# Altium PCB Odrive.PcbDoc (part 4 of 4)
Units mil, origin at the board's own origin, x right, y up, seen from the top; angles counter-clockwise.
Board outline 2874.02 x 1968.5 mil, 4 copper layers (Top Layer, Power, Signal, Bottom Layer), stack 74.892 mil thick; 198 components, 162 nets, 717 pads, 948 vias.
Unrouted connection lines stored in the file: 81.
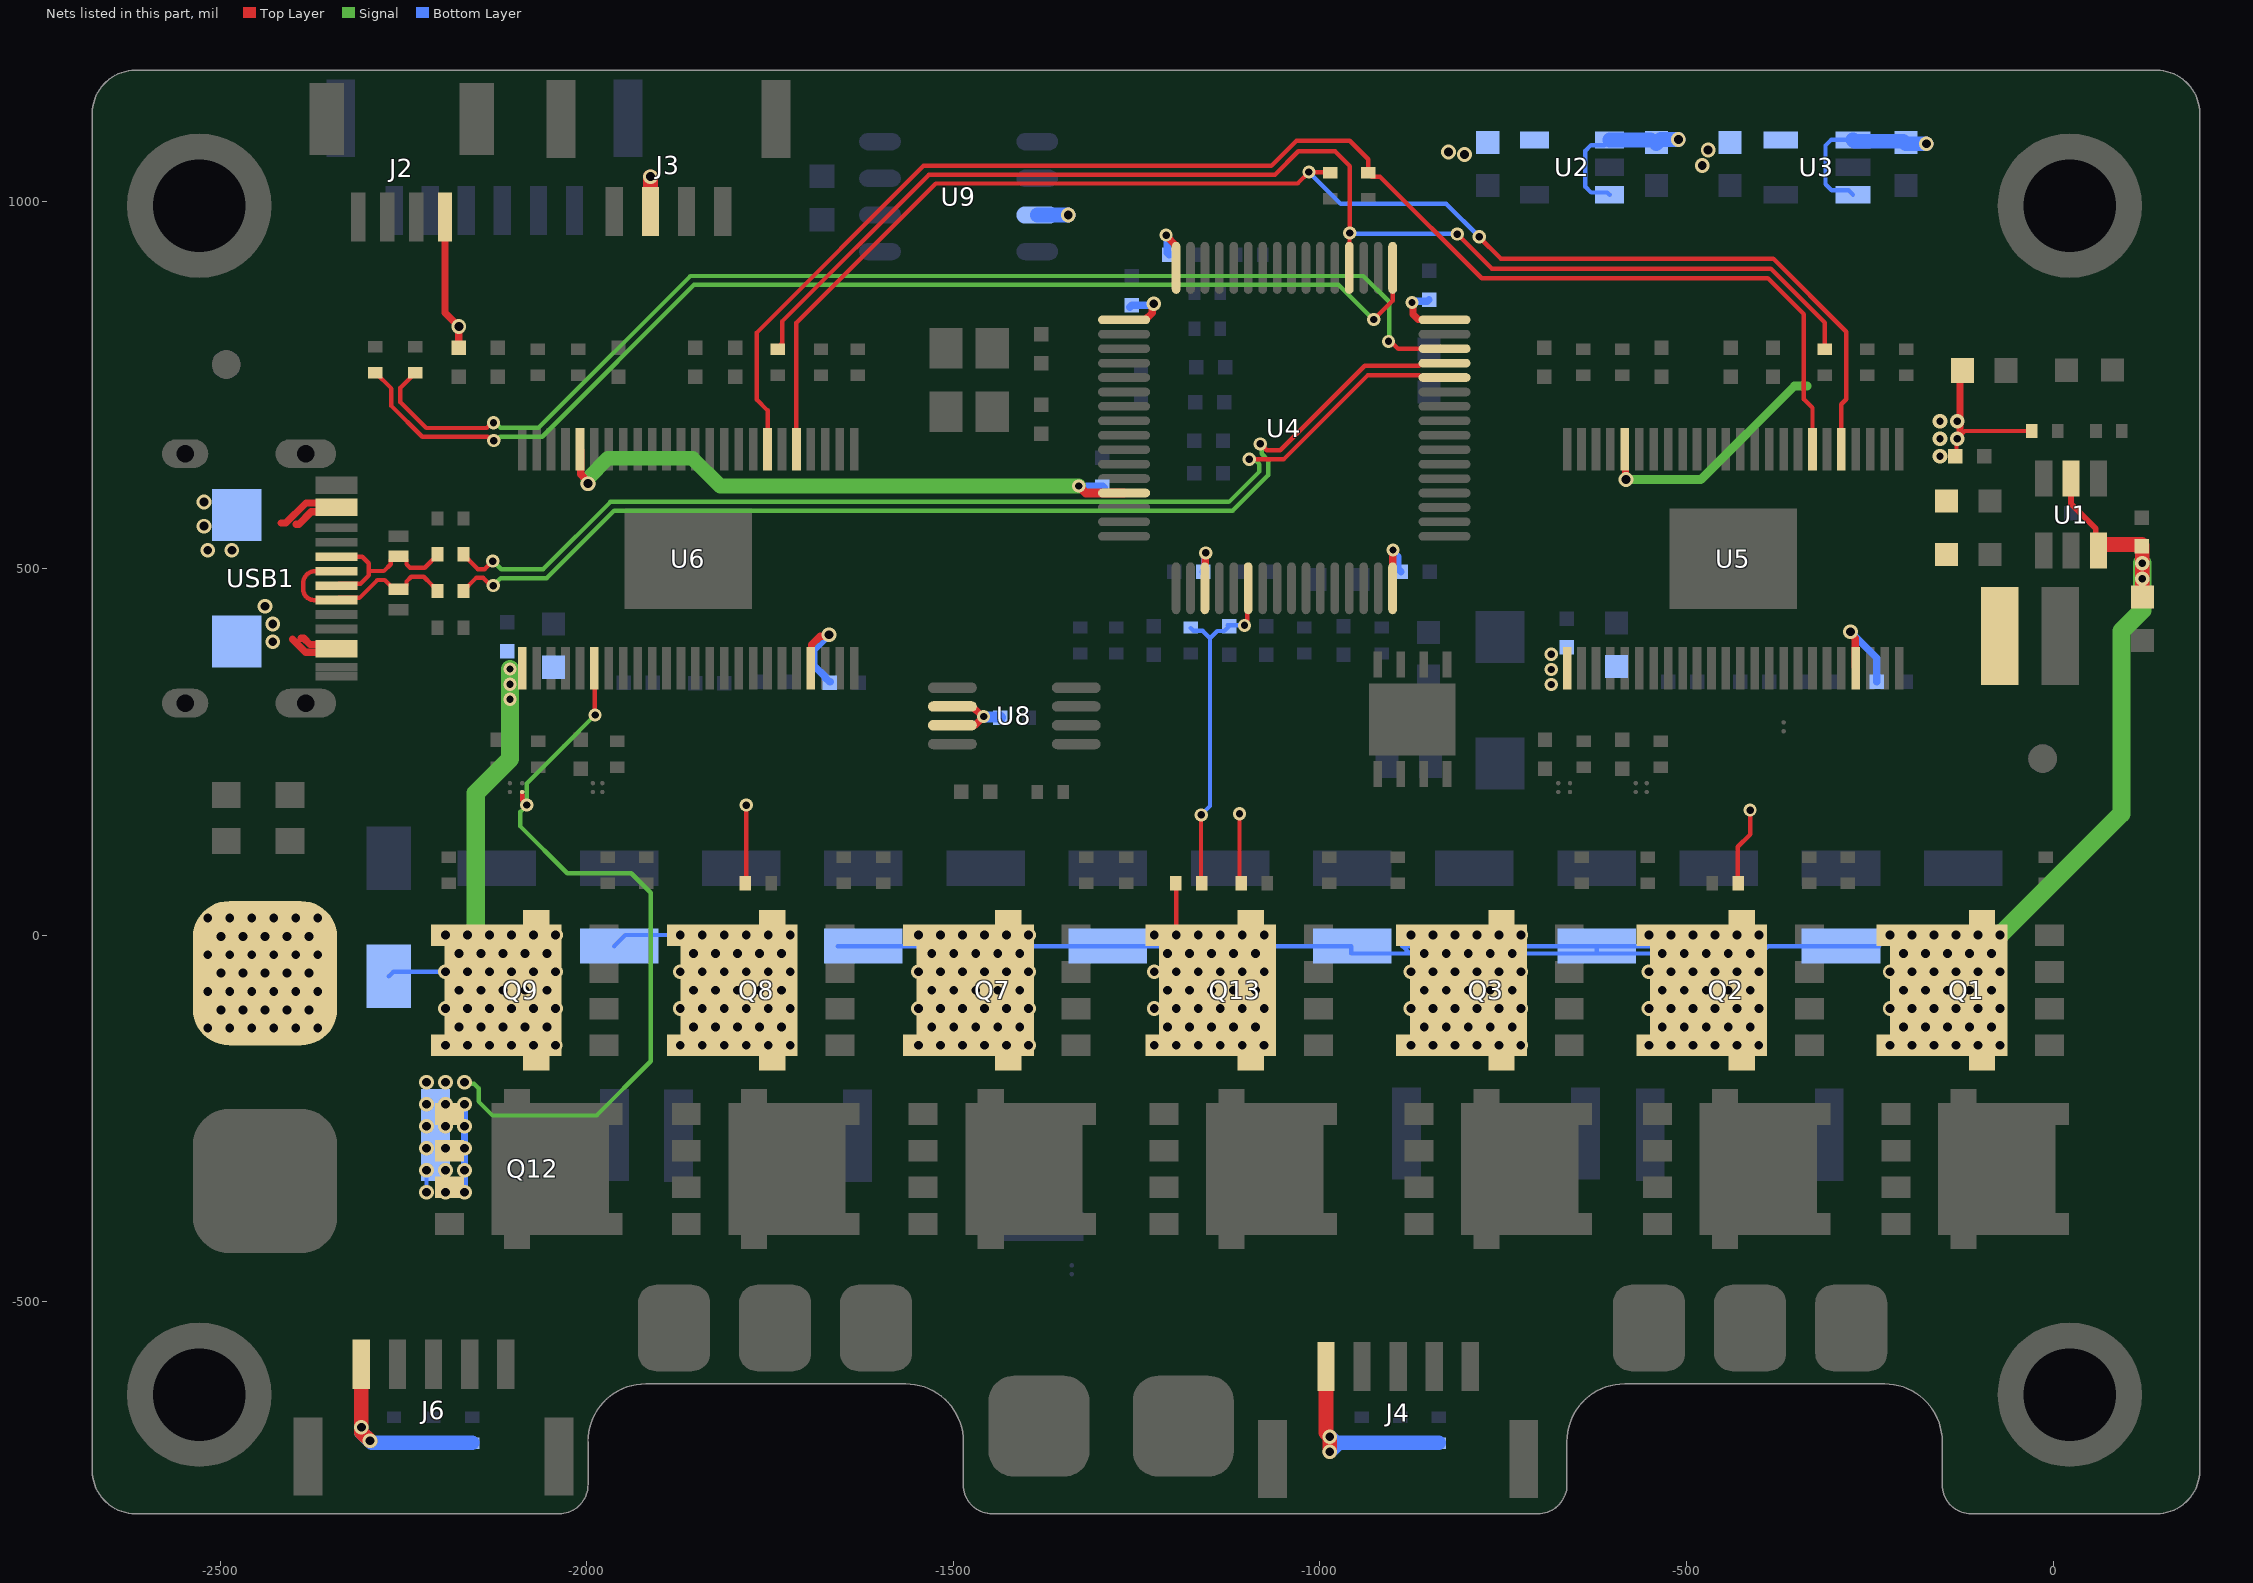
[diagram p5: the nets of this part, all layers, seen from the top]

## Via types
v1: diameter 20, hole 12, Top Layer to Bottom Layer, tented both sides, 616 vias
v2: diameter 18, hole 10, Top Layer to Bottom Layer, tented both sides, 296 vias
v3: diameter 18, hole 12, Top Layer to Bottom Layer, tented both sides, 18 vias
v4: diameter 20, hole 10, Top Layer to Bottom Layer, tented both sides, 18 vias

## Nets (pads, with @x,y where several pads share a name; then routed paths per layer and width w, separated by ;. In a path a pad name is that pad's centre, name@x,y a point inside that pad or via, vN(x,y) a via of type N, cw(c..) or ccw(c..) an arc to the next point about the centre after c; other vN are vias at no path point) (continued)
SL_C_nP: NT8.2 Q12.S R51.2 U6.30 | length 1247.2
  Top Layer w6: -2087.99,192.33 -2087.99,183.89 v2(-2081.77,177.68) ; U6.30@-1989.5,364.17 -1989,363.67 -1989,300.72 v2(-1988.5,300.22)
  Signal w6: v1(-2166.51,-200.47) -2164.44,-202.54 -2153.57,-202.54 -2147.39,-208.73 -2147.39,-226.7 -2128.25,-245.83 -1986.45,-245.83 -1912.43,-171.81 -1912.43,57.77 -1939.13,84.48 -2026.47,84.48 -2090.34,148.34 -2090.34,168.16 -2081.77,176.73 v2(-2081.77,177.68) -2081.77,206.95 -2031.29,257.42 v2(-1988.5,300.22)
  Bottom Layer w6: v1(-2218.41,-350.44) v1(-2218.41,-320.44) ; v1(-2192.46,-350.44) v1(-2192.46,-320.44)
  Bottom Layer w10: R51.2@-2196.16,-290.45 v1(-2192.46,-290.45) -2190.42,-292.49 v1@-2166.51,-292.49 ; v1(-2166.51,-350.44) v1(-2166.51,-320.44) v1@-2166.51,-292.49 ; v1(-2166.51,-290.45) v1@-2166.51,-292.49 ; v1(-2166.51,-230.46) v1(-2166.51,-260.45) v1@-2166.51,-292.49
  other v1: -2218.41,-290.45 -2218.41,-260.45 -2192.46,-260.45 -2218.41,-230.46 -2192.46,-230.46 -2218.41,-200.47 -2192.46,-200.47
SPI_MISO: R29.1 R45.1 U4.52 | length 1790.7
  Top Layer w6: R45.1@-1739.5,801.54 -1733.45,807.59 -1733.45,837.02 -1533.28,1037.18 -1061.23,1037.18 -1029.47,1068.94 -979.34,1068.94 -959.33,1048.93 v2(-959.33,957.56) -959.66,957.23 -959.66,910.45 U4.52@-959.99,910.12 ; v2(-812.6,956.11) -765.58,909.09 -385.28,909.09 -311.68,835.49 R29.1@-311.68,798.57
  Bottom Layer w6: v2(-959.33,957.56) -958.6,956.84 -813.33,956.84 v2(-812.6,956.11)
SPI_MOSI: R20.1 U5.5 U6.5 | length 1971.4
  Top Layer w6: U6.5@-1713.91,662.44 -1713.91,835.12 -1523.84,1025.18 -1030.58,1025.18 -1030.52,1025.12 -1015.02,1040.61 v2(-1015.02,1040.74) ; v2@-1013.09,1038.68 -1011.53,1040.23 -987.24,1040.23 R20.1@-986.18,1039.17 ; v2(-782.75,952.4) -782.75,951.94 -753.5,922.69 -381.91,922.69 -282.32,823.1 -282.32,730.74 -288.91,724.16 U5.5@-288.91,662.44
  Bottom Layer w6: v2(-1015.02,1040.74) -1015.02,1040.61 -971.73,997.32 -827.67,997.32 v2(-782.75,952.4)
SPI_SCK: R19.1 U5.7 U6.7 | length 2000.1
  Top Layer w6: U6.7@-1753.28,662.44 -1753.28,715.64 -1767.85,730.22 -1767.85,821.92 -1540.59,1049.18 -1066.2,1049.18 -1031.92,1083.47 -959.44,1083.47 -934.18,1058.2 -934.18,1039.17 -929.5,1034.49 -918.07,1034.49 -779.44,895.86 -389.02,895.86 -339.96,846.8 -339.96,730.93 -328.28,719.24 U5.7@-328.28,662.44
SWCLK: R9.2 U4.49 | length 1602.8
  Top Layer w6: R9.2@-2288.27,767.46 -2266.24,745.42 -2266.24,721.76 -2224.12,679.65 -2135.03,679.65 -2129.9,674.52 v2(-2126.65,674.52) ; v2(-926.58,839.59) -900.93,865.23 U4.49@-900.93,910.12
  Signal w6: v2(-2126.65,674.52) -2123.41,674.52 -2118.05,679.88 -2060.67,679.88 -1853.58,886.97 -974.68,886.97 -927.3,839.59 v2(-926.58,839.59)
SWDIO: R7.1 U4.46 | length 1653.4
  Top Layer w6: R7.1@-2233.51,767.46 -2233.51,766.95 -2253.98,746.48 -2253.98,726.81 -2218.81,691.65 -2136.51,691.65 -2129.23,698.93 v2(-2127,698.93) ; v2(-906.6,809.78) -903.35,809.78 -893.45,799.88 U4.46@-830.07,799.88
  Signal w6: v2(-2127,698.93) -2124.53,698.93 -2117.48,691.88 -2065.64,691.88 -1858.55,898.97 -940.86,898.97 -905.58,863.7 -905.58,810.8 v2(-906.6,809.78)
USB_5V: D2.2 USB1.A4 USB1.A9 USB1.B4 USB1.B9 | length 268.8
  Top Layer w10: -2416.56,562.09 -2410.2,562.09 -2382.84,589.45 USB1.B9@-2340.91,589.45 ; -2401.07,403.44 -2383.53,385.9 -2342.47,385.9 USB1.B4@-2340.91,384.34 ; -2396,560.52 -2392.36,560.52 -2375.42,577.46 USB1.A4@-2340.91,577.45 ; -2389.03,404.95 -2386,404.95 -2377.39,396.34 USB1.A9@-2340.91,396.34
  other v1: -2427.98,400.24 -2427.98,424.49 -2438.57,448.74
USB_DN: D5.1 R10.1 USB1.A7 USB1.B7 | length 231.4
  Top Layer w6: USB1.A7@-2340.91,476.71 -2338.28,479.34 -2308.37,479.34 -2297.03,490.68 -2297.03,496.7 ; USB1.B7@-2340.91,516.08 -2305.95,516.08 -2297.03,507.17 -2297.03,496.7 ; D5.1@-2262.33,516.79 -2267.2,511.92 -2267.2,506.01 -2276.51,496.7 -2297.03,496.7 ; D5.1@-2256.42,516.79 -2250.51,516.79 -2245.64,511.92 -2245.64,506.01 -2240.87,501.24 -2220.9,501.24 R10.1@-2202.72,519.42
USB_DP: D4.1 R11.1 USB1.A6 USB1.B6 | length 285.3
  Top Layer w6: USB1.A6@-2340.91,496.4 -2370.35,496.4 ccw(c-2370.35,480.26) -2386.49,480.26 -2386.49,471.68 ccw(c-2371.84,471.68) -2371.84,457.03 USB1.B6@-2340.91,457.03 -2338.01,459.93 -2309.89,459.93 -2285.34,484.48 -2275.2,484.48 D4.1@-2262.33,471.6 ; D4.1@-2256.42,471.6 -2250.51,471.6 -2245.64,476.47 -2245.64,482.38 -2239.12,488.89 -2222.19,488.89 -2210.85,477.55 -2210.85,477.05 -2203.22,469.42 R11.1@-2202.72,469.42
USB_N: R10.2 U4.44 | length 1500.9
  Top Layer w6: R10.2@-2168.64,519.42 -2168.13,519.42 -2160.5,511.79 -2160.5,511.28 -2148.52,499.3 -2138.99,499.3 v2(-2128.11,510.18) ; v2(-1096.39,649.05) -1096.12,649.31 -1049.16,649.31 -934.61,763.87 -864.52,763.87 -861.17,760.51 U4.44@-830.07,760.51
  Signal w6: v2(-2128.11,510.18) -2127.48,510.18 -2116.34,499.03 -2059.43,499.03 -1967.56,590.9 -1124.1,590.9 -1082.57,632.43 -1082.57,642.38 -1086.94,646.75 -1094.09,646.75 v2(-1096.39,649.05)
USB_P: R11.2 U4.45 | length 1523.6
  Top Layer w6: R11.2@-2168.64,469.42 -2168.13,469.42 -2160.5,477.05 -2160.5,477.55 -2150.76,487.3 -2141.16,487.3 -2130.58,476.71 v2(-2127.33,476.71) ; v2(-1081.26,670.01) -1072.6,661.31 -1054.13,661.31 -938.79,776.65 -864.72,776.65 -861.17,780.2 U4.45@-830.07,780.2
  Signal w6: v2(-2127.33,476.71) -2117.01,487.03 -2054.45,487.03 -1962.59,578.9 -1119.13,578.9 -1070.57,627.46 -1070.57,647.53 -1079.49,656.45 -1079.49,668.24 v2(-1081.26,670.01)
VBUS_S: C22.2 R4.1 R5.2 U4.22 | length 480.3
  Top Layer w6: R4.1@-1162.13,70.8 -1162.13,163.97 v2(-1161.98,164.12) ; v2(-1102.84,422.54) -1102.84,425.78 -1098.9,429.72 -1098.9,472 U4.22@-1097.79,473.11
  Bottom Layer w6: R5.2@-1176.18,418.94 -1172.53,415.28 -1160.07,415.28 -1149.86,405.08 ; v2(-1161.98,164.12) -1149.86,176.24 -1149.86,405.08 ; C22.2@-1126.1,422.54 v2(-1102.84,422.54) ; C22.2@-1123.78,421.67 -1130.6,414.85 -1140.09,414.85 -1149.86,405.08
VCC3V3_ASYS: C24.2 C36.2 C71.2 RT1.1 RT2.1 RT3.1 U3.5 U4.13 U5.20 U6.20 U8.6 U8.7 | length 1625.5
  Top Layer w6: RT2.1@-1783.03,70.8 -1782.46,71.37 v2(-1782.46,177.4) ; v2(-1109.68,165.63) -1109.68,73.8 RT3.1@-1106.68,70.8 ; RT1.1@-430.21,70.8 -430.21,120.61 -413.31,137.5 v2(-413.31,170.57)
  Top Layer w10: U6.20@-2009.18,662.44 -2008.28,661.53 -2008.28,628.67 -1998.15,618.54 v1(-1998.15,615.84) ; U8.7@-1501.25,286.32 -1500.42,287.15 -1469.65,287.15 v2(-1458.61,298.19) ; U8.6@-1501.25,311.91 -1473.94,311.91 -1460.21,298.19 v2@-1459.38,298.19 ; U5.20@-584.18,662.44 -583.35,661.61 -583.35,622.19 v1(-582.52,621.36)
  Top Layer w12: v2@-1329.34,612.95 -1329.12,612.95 -1319.2,603.03 U4.13@-1267.08,603.03
  Signal w12: v1(-582.52,621.36) -480.54,621.36 -352.9,749.01 -335.5,749.01
  Signal w20: v1(-1998.15,615.84) -1998.15,623.17 -1971.03,650.3 -1855.68,650.3 -1817.99,612.61 v2(-1329,612.61)
  Bottom Layer w12: v2(-1329,612.61) -1327.85,611.46 C36.2@-1296.57,611.46 C36.2@-1295.35,610.25
  Bottom Layer w15: v2(-1458.61,298.19) -1458.04,297.61 -1436.48,297.61 C71.2@-1435.62,296.75
  other v1: -478.59,1049.62 -470.59,1070.82
VCC3V3_SYS: C21.2 C25.2 C31.2 C32.2 C33.2 C34.2 C35.2 C38.2 C53.2 J2.1 J3.3 U2.5 U4.1 U4.19 U4.32 U4.48 U4.64 U5.45 U6.45 U9.3 | length 972.1
  Top Layer w10: J2.1@-2193.16,979.3 -2193.16,849.02 v1(-2174.27,830.12) C25.2@-2174.27,803.3 ; U6.45@-1694.22,364.17 -1693.32,365.08 -1693.32,395.89 -1681.4,407.8 -1671.49,407.8 v1(-1669.58,409.72) ; U4.1@-1267.08,839.25 -1238.04,839.25 -1228.68,848.61 -1228.68,859.2 v1(-1226.77,861.11) ; v2(-1209.73,954.73) -1209.73,953.66 -1196.21,940.14 U4.64@-1196.21,910.12 ; U4.19@-1156.84,473.11 -1156.49,473.46 -1156.49,520.65 v2(-1155.72,521.42) ; U4.32@-900.93,473.11 -900.65,473.4 -900.65,525.04 v2(-900.36,525.33) ; v2(-874.51,862.8) -872.97,861.27 -872.97,846.6 -865.98,839.6 -830.42,839.6 U4.48@-830.07,839.26 ; v1(-276.39,413.76) -276.39,411.06 -270.13,404.79 -270.13,365.08 U5.45@-269.22,364.17
  Top Layer w20: J3.3@-1913,987.13 v1(-1913,1034.49)
  Bottom Layer w10: v1(-1669.58,409.72) -1690.03,389.27 -1690.03,367.54 -1674.76,352.27 -1674.76,351.28 -1668.93,345.45 C53.2@-1667.94,345.45 ; C31.2@-1259.36,856.42 C31.2@-1256.58,859.2 -1228.68,859.2 v1(-1226.77,861.11) ; v2(-1209.73,954.73) -1208.2,953.2 -1208.2,930.75 C35.2@-1205.58,928.13 ; C32.2@-1159.37,495.65 -1157.26,497.76 -1157.26,519.89 v2(-1155.72,521.42) ; v2(-900.36,525.33) -900.36,523.16 -893.46,516.25 -893.46,499.68 C33.2@-889.42,495.65 ; v2(-874.51,862.8) -872.97,864.33 -853.58,864.33 C34.2@-851.18,866.73 ; v1(-276.39,413.76) -240.56,377.93 C38.2@-240.56,345.45
  Bottom Layer w20: U9.3@-1385.42,982.18 v1(-1343.26,982.18)
  other v1: -802.94,1064.77 -824.59,1068.15
VCC5V0_SYS: C4.2 C5.2 C6.2 C20.2 C23.2 D2.1 J4.1 J6.1 L1.2 R1.2 R3.2 R12.2 R13.2 R14.2 R15.2 R16.2 R17.2 U2.1 U2.3 U3.1 U3.3 | length 1224.3
  Top Layer w6: C6.2@-131.95,654.99 v4@-131.95,676.97 ; v4(-130.95,676.97) -120.32,687.6 R1.2@-28.32,687.6
  Top Layer w10: -127.21,688.79 -127.21,766.78 R3.2@-123.63,770.36
  Top Layer w20: J6.1@-2307.24,-585.08 v1(-2307.24,-671.08) -2307.24,-677.72 v1(-2295.43,-689.53) ; J4.1@-991.75,-588.33 -991.75,-678.72 v1(-986.6,-683.87) v1(-986.6,-704.31)
  Bottom Layer w6: U2.3@-605,1009.77 -608.11,1012.88 -630.17,1012.88 -637.98,1020.68 -637.98,1069.72 -630.17,1077.53 -612.05,1077.53 U2.1@-605,1084.57 ; U3.3@-272.99,1009.77 -278.95,1015.74 -302.09,1015.74 -310.58,1024.22 -310.58,1076.94 -302.94,1084.58 U3.1@-272.99,1084.58
  Bottom Layer w20: v1(-2307.24,-671.08) -2307.24,-677.72 -2293,-691.97 -2262.71,-691.97 R17.2@-2155.8,-691.97 ; v1(-986.6,-704.31) -978.5,-696.22 -978.5,-691.97 ; v1(-986.6,-683.87) -978.5,-691.97 ; R14.2@-838.2,-691.97 -890.68,-691.97 -943.16,-691.97 -978.5,-691.97 ; U2.1@-604.93,1084.5 C20.2@-548.9,1084.5 ; C20.2@-541.19,1079.29 -535.44,1085.04 -511.28,1085.04 v1(-511.19,1085.12) ; U3.1@-272.99,1084.58 -271.17,1082.77 -204.36,1082.77 -200.88,1079.29 v1(-172.99,1079.29)
  other v1: -2516.74,525.04 -2483.79,525.04 -2521.78,557.91 -2521.78,590.78
  other v4: -154.46,653.22 -154.46,676.97 -154.46,700.72 -130.95,700.72
VCC16V8_BAT: C2.2 C3.2 C7.2 C8.2 C9.2 C10.2 C11.2 C12.2 C13.2 C14.2 C15.2 C16.2 C17.2 C18.2 C19.2 C50.2 C51.2 C65.2 C66.2 D1.1 J1.1 Q1.D Q2.D Q3.D Q7.D Q8.D Q9.D Q13.D R4.2 U1.3 U1.5 U5.25 U6.25 | length 3660.8
  Top Layer w6: Q7.D@-1559.33,-150.11 -1559.22,-150 v1(-1547.44,-150) ; Q7.D@-1559.33,-0.11 -1559,0.22 v1(-1547.44,0.22) ; v1(-1409.28,-75.04) -1409.21,-75.11 Q7.D@-1398.7,-75.11 ; R4.2@-1196.21,70.8 -1196.21,0.47 v1(-1195.96,0.22)
  Top Layer w8: U1.5@24.31,622.89 24.31,588.33 58.08,554.56 U1.3@58.08,528.09
  Top Layer w10: Q9.D@-2203.2,-150.11 -2162.56,-150.11 v1(-2162.45,-150) ; Q9.D@-2203.2,-0.11 -2203.04,0.05 -2192.61,0.05 v1(-2192.44,0.22)
  Top Layer w20: U1.3@61.71,531.01 63.52,532.82 120.78,532.82 121.61,531.99 v4(121.61,507.45) v4(121.61,485.96) C2.2@121.61,459.25
  Top Layer w25: v1(-2192.44,0.22) v1(-2162.45,0.22) ; v1(-875.93,-150) v1(-845.94,-150) ; v1(-875.93,0.22) v1(-845.94,0.22)
  Signal w25: v1(-2144.27,-75.04) -2151.08,-68.22 -2151.08,193.69 -2104.54,240.22 v2(-2104.54,321.83) v2(-2104.54,342.27) ; v2(-2104.54,342.27) v2(-2104.54,363.04) ; v1(-72.47,0.22) 93.09,165.78 93.09,414.73 121.61,443.26 v4(121.61,507.45)
  Bottom Layer w6: D1.1@-2269.83,-56.16 -2263.53,-49.85 v1(-2192.44,-49.85) ; C8.2@-1962.45,-14.88 -1947.36,0.22 v1(-1872.44,0.22) ; C9.2@-1842.45,-14.88 C9.2@-1817.16,-14.88 ; C10.2@-1657.45,-14.88 -1543.13,-14.88 -1533.05,-24.96 v1(-1529.26,-24.96) ; C11.2@-1481.26,-14.88 -1296.32,-14.88 C13.2@-1136.27,-14.88 ; C13.2@-1136.27,-24.96 C13.2@-1136.27,-14.88 ; C13.2@-1106.28,-24.96 C13.2@-1076.28,-24.96 ; v1@-872.43,0.21 -887.52,-14.88 ; v1@-517.45,0.22 -532.55,-14.88 C16.2@-622.69,-14.88 ; C17.2@-469.27,-24.96 C16.2@-622.69,-24.96 ; C17.2@-409.28,-24.96 -406.6,-22.28 -395.66,-22.28 -388.25,-14.88 -237.54,-14.88 v1(-222.44,0.22) ; v1(-204.26,-24.96) v1(-174.27,-24.96) v1(-144.27,-24.96) v1(-114.28,-24.96) ; -199.91,-14.88 -199.91,-11.03 -192.45,-3.57 v1(-192.45,0.22) ; C13.2@-1136.27,-14.88 -957.06,-14.88 -957.06,-24.96 -877.43,-24.96 ; -887.52,-14.88 C15.2@-789.33,-14.88 C16.2@-622.69,-14.88 ; -887.52,-14.88 -877.43,-24.96 ; -877.43,-24.96 -760.04,-24.96 -760,-25 -759.96,-24.96 C16.2@-622.69,-24.96 ; C16.2@-622.69,-24.96 C16.2@-622.69,-14.88
  other v1: -2192.44,-150 -2132.45,-150 -2102.46,-150 -2072.46,-150 -2042.65,-150 -1872.44,-150 -1842.45,-150 -1812.45,-150 -1782.46,-150 -1752.46,-150 -1722.47,-150 -1517.45,-150 -1487.45,-150 -1457.46,-150 -1427.46,-150 -1397.47,-150 -1225.95,-150 -1195.96,-150 -1165.96,-150 -1135.97,-150 -1105.97,-150 -1076.15,-150 -815.95,-150 -785.95,-150 -755.96,-150 -726.14,-150 -551.34,-150 -521.35,-150 -491.35,-150 -461.36,-150 -431.36,-150 -401.54,-150 -222.44,-150 -192.45,-150 -162.45,-150 -132.46,-150 -102.46,-150 -72.47,-150 -2516.74,-126.71 -2486.75,-126.71 -2456.76,-126.71 -2426.76,-126.71 -2396.77,-126.71 -2366.77,-126.71 -2174.26,-125.11 -2144.27,-125.11 -2114.27,-125.11 -2084.28,-125.11 -2054.28,-125.11 -1854.26,-125.11 -1824.27,-125.11 -1794.27,-125.11 -1764.28,-125.11 -1734.28,-125.11 -1529.26,-125.11 -1499.27,-125.11 -1469.27,-125.11 -1439.28,-125.11 -1409.28,-125.11 -1207.77,-125.11 -1177.77,-125.11 -1147.78,-125.11 -1117.78,-125.11 -1087.79,-125.11 -857.75,-125.11 -827.76,-125.11 -797.76,-125.11 -767.77,-125.11 -737.77,-125.11 -533.16,-125.11 -503.16,-125.11 -473.17,-125.11 -443.17,-125.11 -413.18,-125.11 -204.26,-125.11 -174.27,-125.11 -144.27,-125.11 -114.28,-125.11 -84.28,-125.11 -2498.56,-101.82 -2468.57,-101.82 -2438.57,-101.82 -2408.58,-101.82 -2378.58,-101.82 -2192.44,-99.93 -2162.45,-99.93 -2132.45,-99.93 -2102.46,-99.93 -2072.46,-99.93 -2042.47,-99.93 -1872.44,-99.93 -1842.45,-99.93 -1812.45,-99.93 -1782.46,-99.93 -1752.46,-99.93 -1722.47,-99.93 -1547.44,-99.93 -1517.45,-99.93 -1487.45,-99.93 -1457.46,-99.93 -1427.46,-99.93 -1397.47,-99.93 -1225.95,-99.93 -1195.96,-99.93 -1165.96,-99.93 -1135.97,-99.93 -1105.97,-99.93 -1075.98,-99.93 -875.93,-99.93 -845.94,-99.93 -815.95,-99.93 -785.95,-99.93 -755.96,-99.93 -725.96,-99.93 -551.34,-99.93 -521.35,-99.93 -491.35,-99.93 -461.36,-99.93 -431.36,-99.93 -401.37,-99.93 -222.44,-99.93 -192.45,-99.93 -162.45,-99.93 -132.46,-99.93 -102.46,-99.93 -72.47,-99.93 -2516.74,-76.64 -2486.75,-76.64 -2456.76,-76.64 -2426.76,-76.64 -2396.77,-76.64 -2366.77,-76.64 -2174.26,-75.04 -2114.27,-75.04 -2084.28,-75.04 -2054.28,-75.04 -1854.26,-75.04 -1824.27,-75.04 -1794.27,-75.04 -1764.28,-75.04 -1734.28,-75.04 -1529.26,-75.04 -1499.27,-75.04 -1469.27,-75.04 -1439.28,-75.04 -1207.77,-75.04 -1177.77,-75.04 -1147.78,-75.04 -1117.78,-75.04 -1087.79,-75.04 -857.75,-75.04 -827.76,-75.04 -797.76,-75.04 -767.77,-75.04 -737.77,-75.04 -533.16,-75.04 -503.16,-75.04 -473.17,-75.04 -443.17,-75.04 -413.18,-75.04 -204.26,-75.04 -174.27,-75.04 -144.27,-75.04 -114.28,-75.04 -84.28,-75.04 -2498.56,-51.75 -2468.57,-51.75 -2438.57,-51.75 -2408.58,-51.75 -2378.58,-51.75 -2162.45,-49.85 -2132.45,-49.85 -2102.46,-49.85 -2072.46,-49.85 -2042.47,-49.85 -1872.44,-49.85 -1842.45,-49.85 -1812.45,-49.85 -1782.46,-49.85 -1752.46,-49.85 -1722.47,-49.85 -1547.44,-49.85 -1517.45,-49.85 -1487.45,-49.85 -1457.46,-49.85 -1427.46,-49.85 -1397.47,-49.85 -1225.95,-49.85 -1195.96,-49.85 -1165.96,-49.85 -1135.97,-49.85 -1105.97,-49.85 -1075.98,-49.85 -875.93,-49.85 -845.94,-49.85 -815.95,-49.85 -785.95,-49.85 -755.96,-49.85 -725.96,-49.85 -551.34,-49.85 -521.35,-49.85 -491.35,-49.85 -461.36,-49.85 -431.36,-49.85 -401.37,-49.85 -222.44,-49.85 -192.45,-49.85 -162.45,-49.85 -132.46,-49.85 -102.46,-49.85 -72.47,-49.85 -2516.74,-26.56 -2486.75,-26.56 -2456.76,-26.56 -2426.76,-26.56 -2396.77,-26.56 -2366.77,-26.56 -2174.26,-24.96 -2144.27,-24.96 -2114.27,-24.96 -2084.28,-24.96 -2054.28,-24.96 -1854.26,-24.96 -1824.27,-24.96 -1794.27,-24.96 -1764.28,-24.96 -1734.28,-24.96 -1499.27,-24.96 -1469.27,-24.96 -1439.28,-24.96 -1409.28,-24.96 -1207.77,-24.96 -1177.77,-24.96 -1147.78,-24.96 -1117.78,-24.96 -1087.79,-24.96 -857.75,-24.96 -827.76,-24.96 -797.76,-24.96 -767.77,-24.96 -737.77,-24.96 -533.16,-24.96 -503.16,-24.96 -473.17,-24.96 -443.17,-24.96 -413.18,-24.96 -84.28,-24.96 -2498.56,-1.67 -2468.57,-1.67 -2438.57,-1.67 -2408.58,-1.67 -2378.58,-1.67 -2132.45,0.22 -2102.46,0.22 -2072.46,0.22 -2042.47,0.22 -1842.45,0.22 -1812.45,0.22 -1782.46,0.22 -1752.46,0.22 -1722.47,0.22 -1517.45,0.22 -1487.45,0.22 -1457.46,0.22 -1427.46,0.22 -1397.47,0.22 -1225.95,0.22 -1165.96,0.22 -1135.97,0.22 -1105.97,0.22 -1075.98,0.22 -815.95,0.22 -785.95,0.22 -755.96,0.22 -725.96,0.22 -551.34,0.22 -521.35,0.22 -491.35,0.22 -461.36,0.22 -431.36,0.22 -401.37,0.22 -162.45,0.22 -132.46,0.22 -102.46,0.22 -2516.74,23.51 -2486.75,23.51 -2456.76,23.51 -2426.76,23.51 -2396.77,23.51 -2366.77,23.51
  other v2: -684.54,341.83 -684.54,362.27 -684.54,383.04
pads on no net: FID1.0 FID2.0 FID3.0 FID4.0 H1.1 H2.1 H3.1 H4.1 J2.5 J2.6 J3.5 J3.6 J4.6 J4.7 J5.7 J5.8 J6.6 J6.7 U3.4 U5.1 U6.1 U8.4 U9.5 U9.8 USB1.A8 USB1.B8

## Polygon pours and split planes (outlines as drawn)
GND on Bottom Layer "GND_L04_P504" (solid, remove dead copper, pour order 504): -2615.15,-788.96 -2037.54,-788.96 ccw(c-2037.54,-749.59) -1998.17,-749.59 -1998.17,-690.53 cw(c-1919.43,-690.53) -1919.43,-611.79 -1565.1,-611.79 cw(c-1565.1,-690.53) -1486.36,-690.53 -1486.36,-749.59 ccw(c-1446.99,-749.59) -1446.99,-788.96 -702.54,-788.96 ccw(c-702.54,-749.59) -663.17,-749.59 -663.17,-690.53 cw(c-584.43,-690.53) -584.43,-611.79 -230.1,-611.79 cw(c-230.1,-690.53) -151.36,-690.53 -151.36,-749.59 ccw(c-111.98,-749.59) -111.98,-788.96 140.75,-788.96 ccw(c140.75,-729.91) 199.81,-729.91 199.81,1120.49 ccw(c140.75,1120.49) 140.75,1179.54 -2615.15,1179.54 ccw(c-2615.15,1120.49) -2674.21,1120.49 -2674.21,-729.91 ccw(c-2615.15,-729.91)
PGND on Bottom Layer "PGND_L04_P483" (solid, remove dead copper, pour order 483): 88.48,148.56 156.77,80.27 156.77,-468.44 30.95,-594.27 -2529.61,-594.27 -2639.52,-484.35 -2639.52,104.26 -2595.22,148.56
SENSE_N on Bottom Layer "SENSE_N_L04_P481" (solid, remove dead copper, pour order 481): -1419.03,-738.45 -1348.3,-738.45 ccw(c-1348.3,-704.55) -1314.4,-704.55 -1314.4,-603.21 -1452.19,-603.21 -1452.19,-705.29 ccw(c-1419.03,-705.29)
SL_B_nP on Bottom Layer "SL_B_NP_L04_P480" (solid, remove dead copper, pour order 480): -1908.9,-182.22 -1817.16,-182.22 -1817.16,-357.92 -1831.58,-372.34 -1908.9,-372.34
SL_C_nP on Bottom Layer "SL_C_NP_L04_P479" (solid, remove dead copper, pour order 479): -2237.58,-182.22 -2150.85,-182.22 -2150.85,-372.34 -2237.58,-372.34
SL_B on Bottom Layer "SL_B_L04_P478" (solid, remove dead copper, pour order 478): -588.9,-182.22 -506.37,-182.22 -506.37,-350.46 -520.79,-364.88 -588.9,-364.88
SL_C on Bottom Layer "SL_C_L04_P477" (solid, remove dead copper, pour order 477): -908.9,-182.22 -835.34,-182.22 -835.34,-364.88 -908.9,-364.88
VCC16V8_BAT on Bottom Layer "VCC16V8_BAT_L04_P495" (solid, remove dead copper, pour order 495): -2027.37,351.68 -2027.37,383.22 -2079.48,383.22 -2097.44,401.18 -2119.1,401.18 -2120.87,399.41 -2120.87,325.31 -2108.3,312.74 -2066.31,312.74
VCC16V8_BAT on Bottom Layer "VCC16V8_BAT_L04_P493" (solid, remove dead copper, pour order 493): -577.69,352.68 -577.69,384.18 -581.73,388.22 -634.4,388.22 -652.37,406.18 -675.98,406.18 -695.87,386.29 -695.87,336.36 -690.01,330.5 -599.88,330.5
PGND on Bottom Layer "PGND_L04_P487" (solid, remove dead copper, pour order 487): -869.92,371.23 -871.47,369.68 -871.47,345.45 -915.87,301.05 -915.87,281.01 -889.04,254.18 -867.52,254.18 -832.94,288.76 -832.94,369.68 -834.49,371.23
VCC3V3_SYS on Bottom Layer "VCC3V3_SYS_L04_P474" (solid, remove dead copper, pour order 474): -687.69,1072.76 -687.69,1096.39 -814.2,1096.39 -840.21,1070.37 -840.21,1057.78 -834.16,1051.73 -765.28,1051.73 -744.25,1072.76 -727.06,1072.76
VCC3V3_ASYS on Bottom Layer "VCC3V3_ASYS_L04_P473" (solid, remove dead copper, pour order 473): -475.89,1037.58 -449.93,1063.54 -404.26,1063.54 -395.03,1072.77 -347.79,1072.77 -347.79,1096.39 -471.98,1096.39 -490.96,1077.41 -490.96,1041.68 -486.86,1037.58
VCC5V0_SYS on Bottom Layer "VCC5V0_SYS_L04_P476" (solid, remove dead copper, pour order 476): -2535.71,596.85 -2516.87,615.69 -2451.14,615.69 -2438.4,602.95 -2438.4,530.39 -2455.48,513.3 -2521.78,513.3 -2535.71,527.23
USB_5V on Bottom Layer "USB_5V_L04_P475" (solid, remove dead copper, pour order 475): -2431.31,461.55 -2413.57,443.82 -2413.57,387.34 -2436.11,364.8 -2510.68,364.8 -2510.68,435.92 -2485.05,461.55
VCC16V8_BAT on Bottom Layer "VCC16V8_BAT_L04_P482" (solid, remove dead copper, pour order 482): -2539.25,-149.44 -2520.6,-168.1 -72.62,-168.1 -54.52,-150 -54.52,16.07 -76.73,38.27 -2520.95,38.27 -2539.25,19.97
GND on Top Layer "GND_L01_P501" (solid, remove dead copper, pour order 501): -2614.94,-789.15 -2037.33,-789.16 ccw(c-2037.33,-749.78) -1997.96,-749.78 -1997.96,-690.72 cw(c-1919.22,-690.72) -1919.22,-611.98 -1564.89,-611.98 cw(c-1564.89,-690.72) -1486.15,-690.72 -1486.15,-749.78 ccw(c-1446.78,-749.78) -1446.78,-789.15 -702.33,-789.16 ccw(c-702.33,-749.78) -662.96,-749.78 -662.96,-690.72 cw(c-584.22,-690.72) -584.22,-611.98 -229.89,-611.98 cw(c-229.89,-690.72) -151.15,-690.72 -151.15,-749.78 ccw(c-111.77,-749.78) -111.77,-789.15 140.96,-789.16 ccw(c140.96,-730.1) 200.02,-730.1 200.02,1120.29 ccw(c140.96,1120.29) 140.96,1179.35 -2614.94,1179.35 ccw(c-2614.94,1120.29) -2674,1120.29 -2674,-730.1 ccw(c-2614.94,-730.1)
GND on Top Layer "GND_L01_P460" (solid, remove dead copper, pour order 460): -1334.37,833.35 -1360.75,859.73 -1542.9,859.73 -1563.8,838.84 -1563.8,669.01 -1543.1,648.31 -1357.53,648.31 -1334.37,671.47
VCC5V0_SYS on Top Layer "VCC5V0_SYS_L01_P459" (solid, remove dead copper, pour order 459): -47.21,475.08 -98.39,475.08 -120.14,496.83 -120.14,711.66 -160,711.66 -164.95,706.71 -164.95,407.78 -98.39,341.22 -47.21,341.22
AGND on Top Layer "AGND_L01_P488" (solid, remove dead copper, pour order 488): -2435.44,225.33 -2427.14,233.63 -2426.9,233.39 -2384.27,233.39 -2361.22,210.33 -2361.22,186.88 -2374.58,173.51 -2424.44,173.51 -2435.44,184.51
NetC68_1 on Top Layer "Top Layer-NetC47_1" (solid, remove dead copper, pour order 467): -1149.53,-428.75 -1255.21,-534.43 -1255.21,-718.21 ccw(c-1235.03,-718.21) -1235.03,-738.39 -1139.64,-738.39 ccw(c-1139.64,-716.16) -1117.41,-716.16 -1117.41,-592.09 -972.53,-447.21 -972.53,-35.24 -1023.22,-35.24 -1023.22,-197.39 -1035.83,-210 -1149.53,-210
SH_A on Top Layer "SH_A_L01_P466" (solid, remove dead copper, pour order 466): 28.01,-36.2 -30.31,-36.2 -30.31,-162.77 -76.81,-209.26 -157.39,-209.26 -157.39,-392.72 -215.66,-450.99 -296.51,-450.99 -339.83,-494.3 -339.83,-575.16 -320.24,-594.75 -118.53,-594.75 28.01,-448.21
SH_A_nP on Top Layer "SH_A_NP_L01_P465" (solid, remove dead copper, pour order 465): -1295,-35.24 -1354.36,-35.24 -1354.36,-165.41 -1398.22,-209.26 -1487.39,-209.26 -1487.39,-423.68 -1510.63,-446.91 -1626.85,-446.91 -1662.96,-483.02 -1662.96,-582.04 -1650.25,-594.75 -1517.45,-594.75 -1504.74,-582.04 -1409.72,-582.04 -1295,-467.32
SH_C on Top Layer "SH_C_L01_P464" (solid, remove dead copper, pour order 464): -684.73,-36.2 -684.73,-167.15 -727.58,-210 -807.53,-210 -807.53,-495.24 -708.02,-594.75 -516.3,-594.75 -493.9,-572.35 -493.9,-493.45 -540.44,-446.91 -580.63,-446.91 -624,-403.54 -624,-36.2
SH_C_nP on Top Layer "SH_C_NP_L01_P463" (solid, remove dead copper, pour order 463): -2006.28,-35.24 -2006.28,-182.64 -2033.64,-210 -2128.53,-210 -2128.53,-472.5 -2006.28,-594.75 -1840.77,-594.75 -1825.5,-579.48 -1825.5,-476.82 -1855.41,-446.91 -1901.89,-446.91 -1948.37,-400.44 -1948.37,-35.24
SH_B_nP on Top Layer "SH_B_NP_L01_P462" (solid, remove dead copper, pour order 462): -1616.87,-35.24 -1681.1,-35.24 -1681.1,-166.33 -1724.04,-209.26 -1808.9,-209.26 -1808.9,-576.93 -1791.09,-594.75 -1699.6,-594.75 -1681.1,-576.25 -1681.1,-479.03 -1616.87,-414.8
SH_B on Top Layer "SH_B_L01_P461" (solid, remove dead copper, pour order 461): -305.47,-36.2 -365.44,-36.2 -365.44,-171.52 -403.18,-209.26 -483.9,-209.26 -483.9,-571.66 -460.81,-594.75 -375.57,-594.75 -349.91,-569.09 -349.91,-473.21 -305.47,-428.77
SL_C on Top Layer "SL_C_L01_P458" (solid, remove dead copper, pour order 458): -831.5,-364.25 -831.5,-190.39 -915.1,-190.39 -915.1,-364.25
PGND on Top Layer "PGND_L01_P457" (solid, remove dead copper, pour order 457): -181.13,-364.25 -181.13,-190.39 -258.82,-190.39 -258.82,-364.25
PGND on Top Layer "PGND_L01_P456" (solid, remove dead copper, pour order 456): -1506.97,-364.25 -1506.97,-190.39 -1584.66,-190.39 -1584.66,-364.25
SL_C_nP on Top Layer "SL_C_NP_L01_P455" (solid, remove dead copper, pour order 455): -2152.5,-364.25 -2152.5,-190.39 -2230.19,-190.39 -2230.19,-364.25
SL_B on Top Layer "SL_B_L01_P454" (solid, remove dead copper, pour order 454): -505.47,-364.25 -505.47,-190.39 -583.16,-190.39 -583.16,-364.25
SL_B_nP on Top Layer "SL_B_NP_L01_P453" (solid, remove dead copper, pour order 453): -1832.24,-364.25 -1832.24,-190.39 -1909.92,-190.39 -1909.93,-364.25
PGND on Top Layer "PGND_L01_P451" (solid, remove dead copper, pour order 451): -1173.5,-364.25 -1173.5,-190.39 -1239.04,-190.39 -1239.04,-364.25
VCC16V8_BAT on Top Layer "Top Layer-VCC16V8_BAT" (solid, remove dead copper, pour order 449): -2115.23,312.98 -2100.49,312.98 -2082.02,331.46 -2082.02,393.21 -2115.23,393.21
PGND on Top Layer "PGND_L01_P484" (solid, remove dead copper, pour order 484): -2540.36,139.03 -2533.43,145.95 -2364.32,145.95 -2354.58,136.21 -2354.58,113.49 -2380.44,87.63 -2512.74,87.63 -2540.36,115.24
NetC1_1 on Top Layer "NETC1_1_L01_P450" (solid, remove dead copper, pour order 450): 12.5,510.34 12.5,492.61 -5.03,475.08 -15.71,475.08 -15.71,341.18 36.12,341.18 36.12,510.34
USB_5V on Top Layer "USB_5V_L01_P452" (solid, remove dead copper, pour order 452): -2466.59,424.59 -2417.52,375.52 -2369.46,375.52 -2369.46,402.25 -2403.62,436.41 -2403.62,533.58 -2369.46,567.74 -2369.46,595.36 -2403.94,595.36 -2466.59,532.71
VCC16V8_BAT on Top Layer "Top Layer-VCC16V8_BAT" (solid, remove dead copper, pour order 448): -694.97,331.29 -660.86,331.29 -657.02,335.14 -657.02,393.21 -694.97,393.21
GND on Signal "GND_L03_P503" (solid, remove dead copper, pour order 503): -2615.15,-788.96 -2037.54,-788.96 ccw(c-2037.54,-749.59) -1998.17,-749.59 -1998.17,-690.53 cw(c-1919.43,-690.53) -1919.43,-611.79 -1565.1,-611.79 cw(c-1565.1,-690.53) -1486.36,-690.53 -1486.36,-749.59 ccw(c-1446.99,-749.59) -1446.99,-788.96 -702.54,-788.96 ccw(c-702.54,-749.59) -663.17,-749.59 -663.17,-690.53 cw(c-584.43,-690.53) -584.43,-611.79 -230.1,-611.79 cw(c-230.1,-690.53) -151.36,-690.53 -151.36,-749.59 ccw(c-111.98,-749.59) -111.98,-788.96 140.75,-788.96 ccw(c140.75,-729.91) 199.81,-729.91 199.81,1120.49 ccw(c140.75,1120.49) 140.75,1179.54 -2615.15,1179.54 ccw(c-2615.15,1120.49) -2674.21,1120.49 -2674.21,-729.91 ccw(c-2615.15,-729.91)
VCC3V3_ASYS on Signal "Signal-VCC3V3_ASYS" (solid, remove dead copper, pour order 472): -2313.33,316.45 -1936.03,316.45 -1818.28,198.7 -1768.45,148.87 -1103.87,148.87 -1094.46,158.27 -1094.46,198.58 -1125.51,229.63 -1373.31,229.63 -1494.31,350.63 -1494.31,386 -663.17,386 -663.17,325.91 -490.72,153.46 -269.7,153.46 -185.48,237.68 -185.48,862.72 -409.28,1086.52 -480.42,1157.66 -2125.09,1157.66 -2341.56,941.19 -2341.56,344.69
VCC3V3_SYS on Signal "VCC3V3_SYS_L03_P471" (solid, remove dead copper, pour order 471): -2030.42,1079.18 -2268.33,841.26 -2268.33,660.11 -2245.17,636.95 -1793.03,636.95 -1713.91,557.83 -1713.91,409.3 -1700.25,395.64 -278.23,395.64 -263.78,410.09 -263.78,617.64 -725.32,1079.18
VCC16V8_BAT on Signal "VCC16V8_BAT_L03_P496" (solid, remove dead copper, pour order 496): -702.99,392.88 -677.24,392.88 -667.18,382.82 -667.18,206.09 -694.14,179.13 -694.14,-139.51 -722.43,-167.8 -879.82,-167.8 -893.44,-154.18 -890.23,-150.97 -890.23,55.62 -722.43,223.43 -722.43,373.44
VCC5V0_SYS on Signal "Signal-VCC5V0_SYS" (solid, remove dead copper, pour order 470): -2497.63,317.17 -2604.57,210.23 -2604.57,-458.75 -2547.67,-515.64 -2497.63,-515.64 -2321.4,-691.87 -2309.58,-703.69 -2309.62,-703.66 ccw(c-2295.43,-689.53) -2295.43,-709.55 -2078.94,-709.55 -1965.93,-596.54 -1113.33,-596.54 -995.39,-714.48 -732.7,-714.48 -252.45,-234.23 -252.45,15.14 -114.28,153.32 -114.27,685.8 -114.27,1076.71 -155.04,1117.47 -487.91,1117.47 ccw(c-371.26,946.66) -517.77,1092.67 ccw(c-511.2,1085.11) -504.11,1078.04 -489.58,1092.57 -392.95,1092.57 -174.27,873.88 -174.27,393.02 -174.27,210.23 -322.32,62.18 -322.32,-189.33 -802.5,-669.52 -951.67,-669.52 -1105.55,-515.64 -1981.88,-515.64 -2125.94,-659.7 -2268.42,-659.7 -2469.66,-458.46 -2512.22,-458.55 -2561.76,-409.01 -2561.76,190.33 -2457.68,294.41 -2457.6,518.87 ccw(c-2466.69,519.37) -2457.69,520.75 -2457.6,520.84 -2457.6,547.86 -2513.59,603.85 -2527.9,603.85 -2535.71,596.04 -2535.71,520.84 -2497.63,482.76
VCC16V8_BAT on Signal "VCC16V8_BAT_L03_P498" (solid, remove dead copper, pour order 498): -220.35,17.17 -71.45,17.17 -57.54,3.26 -57.54,-152.91 -72.43,-167.8 -229.82,-167.8 -243.44,-154.18 -240.23,-150.97 -240.23,-2.71
VCC16V8_BAT on Signal "VCC16V8_BAT_L03_P497" (solid, remove dead copper, pour order 497): -2212.49,-146.52 -2191.19,-167.82 -2042.18,-167.82 -2014.96,-140.6 -2014.96,-6.19 -2036.88,15.73 -2192.18,15.73 -2212.49,-4.57
AGND on Power "AGND_L02_P468" (solid, remove dead copper, pour order 468): -624.32,845.53 -462.72,1007.14 -406.85,1007.14 -399.65,999.93 -399.65,957.08 -511.19,845.53 -511.19,825.36 -613.92,722.63 -613.92,607.16 -937.3,283.78 -1417.32,283.78 -1452.84,319.3 -1987.48,319.3 -2145.7,161.08 -2421.38,161.08 -2434.48,174.19 -2434.48,234.77 -2426.76,242.49 -2180.39,242.49 -2065.15,357.74 -2065.15,532.43 -2105.4,572.67 -2105.4,785.26 -2138.69,818.55 -2138.69,834.2 -2127.35,845.53 -1947.78,845.53 -1937.14,834.88 -1937.14,818.19 -2029.91,725.42 -2029.91,611.76 -1953.36,535.21 -1953.36,468.51 -1876.42,391.57 -1620.2,391.57 -1496.78,514.99 -1388.11,514.99 -1331.36,571.75 -1331.36,652.52 -1268,652.52 -1129.93,790.59 -1099.8,790.59 -1057.9,748.69 -1057.9,560.65 -1026.02,528.77 -1026.02,510.34 -1007.61,491.93 -844.62,491.93 -708.68,627.87 -708.68,834.71 -697.87,845.53
GND on Power "GND_L02_P502" (solid, remove dead copper, pour order 502): -2615.15,-788.96 -2037.54,-788.96 ccw(c-2037.54,-749.59) -1998.17,-749.59 -1998.17,-690.53 cw(c-1919.43,-690.53) -1919.43,-611.79 -1565.1,-611.79 cw(c-1565.1,-690.53) -1486.36,-690.53 -1486.36,-749.59 ccw(c-1446.99,-749.59) -1446.99,-788.96 -702.54,-788.96 ccw(c-702.54,-749.59) -663.17,-749.59 -663.17,-690.53 cw(c-584.43,-690.53) -584.43,-611.79 -230.1,-611.79 cw(c-230.1,-690.53) -151.36,-690.53 -151.36,-749.59 ccw(c-111.98,-749.59) -111.98,-788.96 140.75,-788.96 ccw(c140.75,-729.91) 199.81,-729.91 199.81,1120.49 ccw(c140.75,1120.49) 140.75,1179.54 -2615.15,1179.54 ccw(c-2615.15,1120.49) -2674.21,1120.49 -2674.21,-729.91 ccw(c-2615.15,-729.91)
PGND on Power "Power-PGND" (solid, remove dead copper, pour order 490): -2638.33,-485.93 -2605,-519.27 104.49,-519.27 156.67,-467.09 156.67,78.46 86.57,148.56 -800.27,148.56 -819.58,167.88 -819.58,298.81 -856.92,336.15 -887.66,336.15 -927.12,296.69 -927.12,169.45 -948.01,148.56 -2597.62,148.56 -2638.33,107.85
VCC16V8_BAT on Power "VCC16V8_BAT_L02_P469" (solid, remove dead copper, pour order 469): -2539.25,-127.49 -2498.65,-168.1 -72.62,-168.1 -54.52,-150 -54.52,0.21 -92.59,38.27 -2520.95,38.27 -2539.25,19.97

## Other copper
Top Layer:
  pour cut-out: -847.32,-410.37 -807.9,-410.37 -818.75,-435.53 -972.53,-435.53
  pour cut-out: -1909.24,60.17 -1794.17,60.17 -1839.95,14.39 -1886.47,14.39
Power:
  pour cut-out: -1311.27,-519.27 -1248.41,-519.27 -1248.41,-530.48 -1311.27,-530.48
Signal:
  pour cut-out: -175.79,-498.87 -175.77,-498.85 cw(c-189.95,-484.75)
  pour cut-out: -2000.08,-533.84 cw(c-1985.89,-547.95) -2000.06,-533.82
Bottom Layer:
  pour cut-out: -1453.22,-423.73 -1452.19,-424.76 -1452.19,-603.21 -1314.4,-603.21 -1317.16,-600.44 -1317.16,-423.73

## Silkscreen, mask and mechanical layers (free items; w line width, h text height)
Top Overlay:
  drawing of 11 lines, arcs and shapes, not listed
  text "ODRIVE" at -835.23,1041.78 h157.48
  text "v3.5.2" at -637.95,958.27 h98.43
  text "SWD" at -2173.84,922.57 h98.43 r180
  text "CAN" at -1809.46,922.57 h98.43 r180
  text "M3" at 99.96,852.03 h78.74
  text "M3" at -2626.13,829.81 h78.74
  text "PWR" at -151.48,802.42 h98.43
  text "USB" at -2291.64,604.12 h98.43
  text "48V" at -2320.58,267.61 h157.48 r270
  text "BATT" at -2321.91,-52.59 h98.43 r270
  text "AUX" at -1367.71,-488.84 h98.43
  text "VZBAG" at -2242.19,-491.09 h59.06
  text "VZBAG" at -920.03,-494.88 h59.06
  text "M3" at -2638.77,-500.66 h78.74
  text "M1" at -2097.76,-502.78 h98.43
  text "M0" at -775.61,-506.57 h98.43
  text "M3" at 92.24,-517.55 h78.74
  text "10R" at -1304.49,-528.47 h60
  text "R" at -1367.71,-538.65 h60
  text "ENC1" at -2097.76,-544.36 h59.06
  text "ENC0" at -775.61,-548.15 h59.06
  text "50W" at -1303.69,-578.44 h60
  text "P" at -1367.71,-587.15 h60
Bottom Overlay:
  region: -1022.26,-606.44 -1022.26,-601.44 -786.05,-601.44 -786.05,-606.44
  region: -791.05,-504.12 -786.05,-504.12 -786.05,-601.44 -791.05,-601.44
  region: -1022.26,-504.12 -1017.26,-504.12 -1017.26,-601.44 -1022.26,-601.44
  region: -2328.78,-486.12 -2323.78,-486.12 -2323.78,-583.44 -2328.78,-583.44
  region: -2328.78,-588.44 -2328.78,-583.44 -2092.56,-583.44 -2092.56,-588.44
  region: -2097.56,-486.12 -2092.56,-486.12 -2092.56,-583.44 -2097.56,-583.44
  text "©Sandman Zhang / Designed by: Sandman Zhang / Date: 2025/1/5" at -172.71,519.07 h59.06
  text "M1" at -2092.56,-486.12 h59.06
  text "M0" at -786.05,-504.12 h59.06
  text "Z" at -2240.22,-551.76 h29.53
  text "B" at -2202.43,-551.76 h29.53
  text "A" at -2158.75,-551.76 h29.53
  text "5V" at -2317.03,-561.39 h29.53 r270
  text "Z" at -933.71,-569.76 h29.53
  text "B" at -895.91,-569.76 h29.53
  text "A" at -852.24,-569.76 h29.53
  text "GND" at -2137.03,-572.45 h29.53 r270
  text "5V" at -1010.51,-579.39 h29.53 r270
  text "GND" at -830.51,-590.45 h29.53 r270
Mechanical 1:
  the board outline again, w7.87
Drill Drawing:
  drawing of 342 lines, arcs and shapes, not listed
  text "Layer" at 2407.5,225 h60
  text "Name" at 2817.41,225 h60
  text "Material" at 3747.16,225 h60
  text "Thickness" at 4606.92,225 h60
  text "Constant" at 5256.76,225 h60
  text "Board Layer Stack" at 5826.62,225 h60
  text "Top Overlay" at 2817.41,105 h60
  text "Top Solder" at 2817.41,-15 h60
  text "Solder Resist" at 3747.16,-15 h60
  text "0.010mm" at 4606.92,-15 h60
  text "3.5" at 5256.76,-15 h60
  text "1" at 2407.5,-135 h60
  text "Top Layer" at 2817.41,-135 h60
  text "0.070mm" at 4606.92,-135 h60
  text "Dielectric 1" at 2817.41,-255 h60
  text "PP-006" at 3747.16,-255 h60
  text "0.071mm" at 4606.92,-255 h60
  text "4.1" at 5256.76,-255 h60
  text "2" at 2407.5,-375 h60
  text "Power" at 2817.41,-375 h60
  text "CF-004" at 3747.16,-375 h60
  text "0.035mm" at 4606.92,-375 h60
  text "Dielectric1" at 2817.41,-495 h60
  text "FR-4" at 3747.16,-495 h60
  text "1.550mm" at 4606.92,-495 h60
  text "4.8" at 5256.76,-495 h60
  text "3" at 2407.5,-615 h60
  text "Signal" at 2817.41,-615 h60
  text "CF-004" at 3747.16,-615 h60
  text "0.035mm" at 4606.92,-615 h60
  text "Dielectric 2" at 2817.41,-735 h60
  text "PP-006" at 3747.16,-735 h60
  text "0.071mm" at 4606.92,-735 h60
  text "4.1" at 5256.76,-735 h60
  text "4" at 2407.5,-855 h60
  text "Bottom Layer" at 2817.41,-855 h60
  text "0.070mm" at 4606.92,-855 h60
  text "Bottom Solder" at 2817.41,-975 h60
  text "Solder Resist" at 3747.16,-975 h60
  text "0.010mm" at 4606.92,-975 h60
  text "3.5" at 5256.76,-975 h60
  text "Bottom Overlay" at 2817.41,-1095 h60
  text "Total board thickness:" at 2407.5,-1215 h60
  text "1.923mm" at 4606.92,-1215 h60
  text "Symbol" at -7740.26,-2125 h72
  text "Count" at -7234.38,-2125 h72
  text "Hole Size" at -6634.54,-2125 h72
  text "Plated" at -5484.88,-2125 h72
  text "Hole Type" at -4979,-2125 h72
  text "Drill Layer Pair" at -4245.2,-2125 h72
  text "Via/Pad" at -2745.65,-2125 h72
  text "Pad Shape" at -2155.8,-2125 h72
  text "Template" at -1410,-2125 h72
  text "Description" at 1429.12,-2125 h72
  text "Hole Tolerance (+)" at 2282.88,-2125 h72
  text "Hole Tolerance (-)" at 3616.49,-2125 h72
  text "Hole Length" at 4950.1,-2125 h72
  text "Routed Path Length" at 6029.78,-2125 h72
  text "2" at -7234.38,-2275 h60
  text "23.60mil (0.599mm)" at -6634.54,-2275 h60
  text "PTH" at -5484.88,-2275 h60
  text "Slot" at -4979,-2275 h60
  text "Top Layer - Bottom Layer" at -4245.2,-2275 h60
  text "Pad" at -2745.65,-2275 h60
  text "Rounded" at -2155.8,-2275 h60
  text "r100_160h60_120r50m110_170mx110_170p0_503323056" at -1410,-2275 h60
  text "47.20mil (1.199mm)" at 4950.1,-2275 h60
  text "23.60mil (0.599mm)" at 6029.78,-2275 h60
  text "2" at -7234.38,-2425 h60
  text "23.60mil (0.599mm)" at -6634.54,-2425 h60
  text "PTH" at -5484.88,-2425 h60
  text "Slot" at -4979,-2425 h60
  text "Top Layer - Bottom Layer" at -4245.2,-2425 h60
  text "Pad" at -2745.65,-2425 h60
  text "Rounded" at -2155.8,-2425 h60
  text "r100_210h60_180r50m110_220mx110_220p0_503323056" at -1410,-2425 h60
  text "70.90mil (1.801mm)" at 4950.1,-2425 h60
  text "47.30mil (1.201mm)" at 6029.78,-2425 h60
  text "4" at -7234.38,-2575 h60
  text "125.98mil (3.200mm)" at -6634.54,-2575 h60
  text "PTH" at -5484.88,-2575 h60
  text "Round" at -4979,-2575 h60
  text "Top Layer - Bottom Layer" at -4245.2,-2575 h60
  text "Pad" at -2745.65,-2575 h60
  text "Rounded" at -2155.8,-2575 h60
  text "c500h320m0mx0" at -1410,-2575 h60
  text "-" at 4950.1,-2575 h60
  text "-" at 6029.78,-2575 h60
  text "314" at -7234.38,-2725 h60
  text "10.00mil (0.254mm)" at -6634.54,-2725 h60
  text "PTH" at -5484.88,-2725 h60
  text "Round" at -4979,-2725 h60
  text "Top Layer - Bottom Layer" at -4245.2,-2725 h60
  text "Via" at -2745.65,-2725 h60
  text "Rounded" at -2155.8,-2725 h60
  text "(Mixed)" at -1410,-2725 h60
  text "-" at 4950.1,-2725 h60
  text "-" at 6029.78,-2725 h60
  text "634" at -7234.38,-2875 h60
  text "12.00mil (0.305mm)" at -6634.54,-2875 h60
  text "PTH" at -5484.88,-2875 h60
  text "Round" at -4979,-2875 h60
  text "Top Layer - Bottom Layer" at -4245.2,-2875 h60
  text "Via" at -2745.65,-2875 h60
  text "Rounded" at -2155.8,-2875 h60
  text "(Mixed)" at -1410,-2875 h60
  text "-" at 4950.1,-2875 h60
  text "-" at 6029.78,-2875 h60
  text "956 Total" at -7234.38,-3025 h60
  text "Slot definitions :" at -7740.26,-3169.97 h60
  text "Routed Path Length" at -6707.57,-3169.97 h60
  text "= Calculated from tool start centre position to tool end centre position." at -5604.9,-3169.97 h60
  text "Hole Length" at -6707.57,-3269.95 h60
  text "= Routed Path Length + Tool Size = Slot length as defined in the PCB layout" at -6014.77,-3269.95 h60

## Dimensions
-2615.15,1179.54 to -2615.15,-788.96 on Drill Drawing
-2674.21,-729.91 to 199.81,-729.91 on Drill Drawing